# EAGLE board switch (EAGLE 6.5.0)
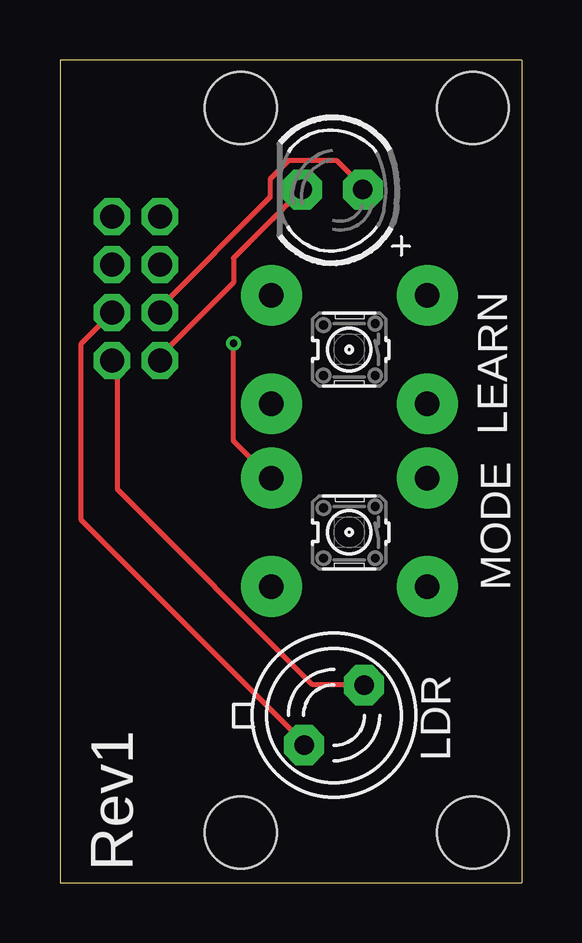
[diagram p0: board, top side]
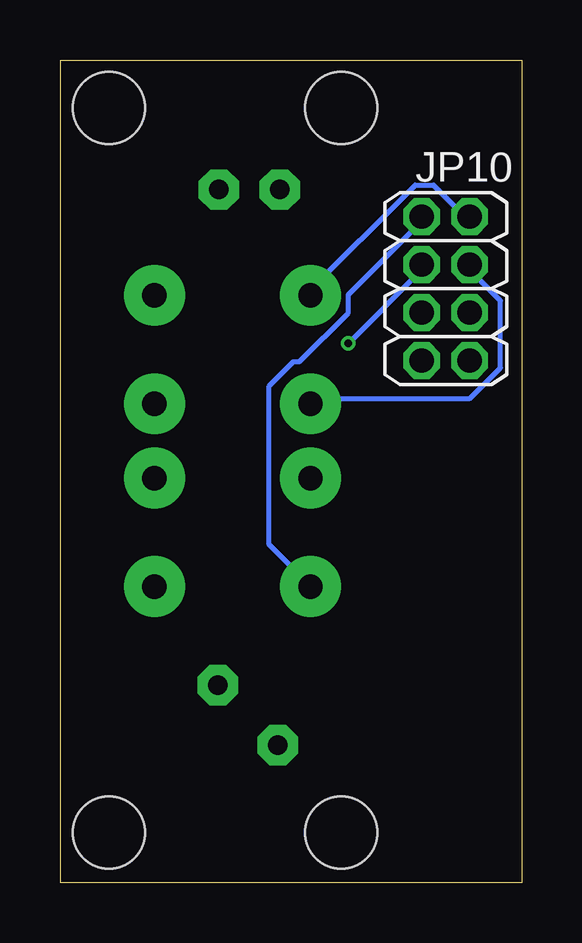
[diagram p1: board, bottom side, seen from below]

Size 19.26 x 34.3 mm. Coordinates in mm from the lower left corner, seen from the top.
Outline: 0,0 19.26,0 19.26,34.3 0,34.3 0,0
Copper layers (1*16): Top 0.035mm / dielectric 1.5mm / Bottom 0.035mm
Design rules "ITEADstudio_DRC": minimum track width 6mil, minimum drill 12mil, track to track 6mil, track to pad 6mil, pad to pad 6mil, via to via 6mil, smd to smd 0mil, copper to edge 10mil, drill to drill 10mil, minimum pad ring 10mil, minimum via ring 6mil, stop-mask expansion 2mil, vias tented up to drill 100mil, thermal gap 10mil
Holes 3 mm at 17.22,32.3 7.54,32.3 7.54,2.1 17.22,2.1

## Footprints (pad centres in the part's own frame; a part is rotated, then mirrored left to right if it is on the bottom)
2X04 = drill 1.016 octagon: 1 -3,-1; 2 -3,1; 3 -1,-1; 4 -1,1; 5 1,-1; 6 1,1; 7 3,-1; 8 3,1
BPX65 = drill 0.813 pad 1.676 octagon: A -1.25,-1.25; K 1.25,1.25
B3F-10XX = drill 1.016 pad 2.54: 1 -3.251,2.261; 2 3.251,2.261; 3 -3.251,-2.261; 4 3.251,-2.261
LED3MM = drill 0.813 pad 1.676 octagon: A -1.27,0; K 1.27,0

## Placement (x,y rotation side)
JP10  [2X04]  3.17,24.77 270 bottom
LDR  BPX65  [BPX65]  11.43,6.99 0 top
LEARN  [B3F-10XX]  12.06,22.23 180 top
LED1  [LED3MM]  11.37,28.89 180 top
MODE  [B3F-10XX]  12.06,14.61 180 top

## Library data of the parts
JP10 = 8wireidc
LDR = opto-trans-siemens; MPN: BPX65.; OC_FARNELL: 327451; OC_NEWARK: 06WX2764
LEARN MODE = switch-omron; MPN: B3F-1000; OC_FARNELL: 176432; OC_NEWARK: 36M3542
LED1 = adafruit

## Nets
N$1: JP10.1 MODE.2
N$2: JP10.4 LEARN.2
N$3: JP10.2 LEARN.4
N$4: JP10.3 MODE.4
N$5: JP10.7 LED1.K
N$6: JP10.5 LED1.A
N$7: JP10.6 LDR.A
N$8: JP10.8 LDR.K

## Tracks (layer width: path | path; a pad name or v marks a point on that pad's centre or on a via)
N$1
  Bottom 0.203: JP10.1 4.19,27.56 7.24,24.51 7.24,23.75 9.27,21.72 9.53,21.72 10.54,20.7 10.54,14.1 9.02,12.57 MODE.2
N$2
  Bottom 0.203: JP10.4 2.16,25.53 0.89,24.26 0.89,21.46 2.16,20.19 8.76,20.19 LEARN.2
N$3
  Bottom 0.203: JP10.2 2.41,27.81 3.68,29.08 4.45,29.08 9.02,24.51 LEARN.4
N$4  (via drill 0.3)
  Top 0.203: v7.24,22.48 7.24,18.41 8.76,16.89 MODE.4
  Bottom 0.203: v7.24,22.48 4.19,25.53 JP10.3
N$5
  Top 0.203: JP10.7 4.19,21.97 7.24,25.02 7.24,26.04 10.03,28.83 LED1.K
N$6
  Top 0.203: JP10.5 4.19,24 8.76,28.57 8.76,29.34 9.53,30.1 11.56,30.1 12.57,29.08 LED1.A
N$7
  Top 0.203: JP10.6 0.89,22.48 0.89,15.11 10.03,5.97 LDR.A
N$8
  Top 0.203: JP10.8 2.41,21.72 2.41,16.38 10.54,8.26 12.57,8.26 LDR.K

## Text on the board
tNames: Rev1